# Altium PCB RF-Remute-FT-V1.1.PcbDoc
Units mm, origin at the board's own origin, x right, y up, seen from the top; angles counter-clockwise.
Board outline 40 x 50 mm, 2 copper layers (Top Layer, Bottom Layer); 25 components, 22 nets, 69 pads, 0 vias.
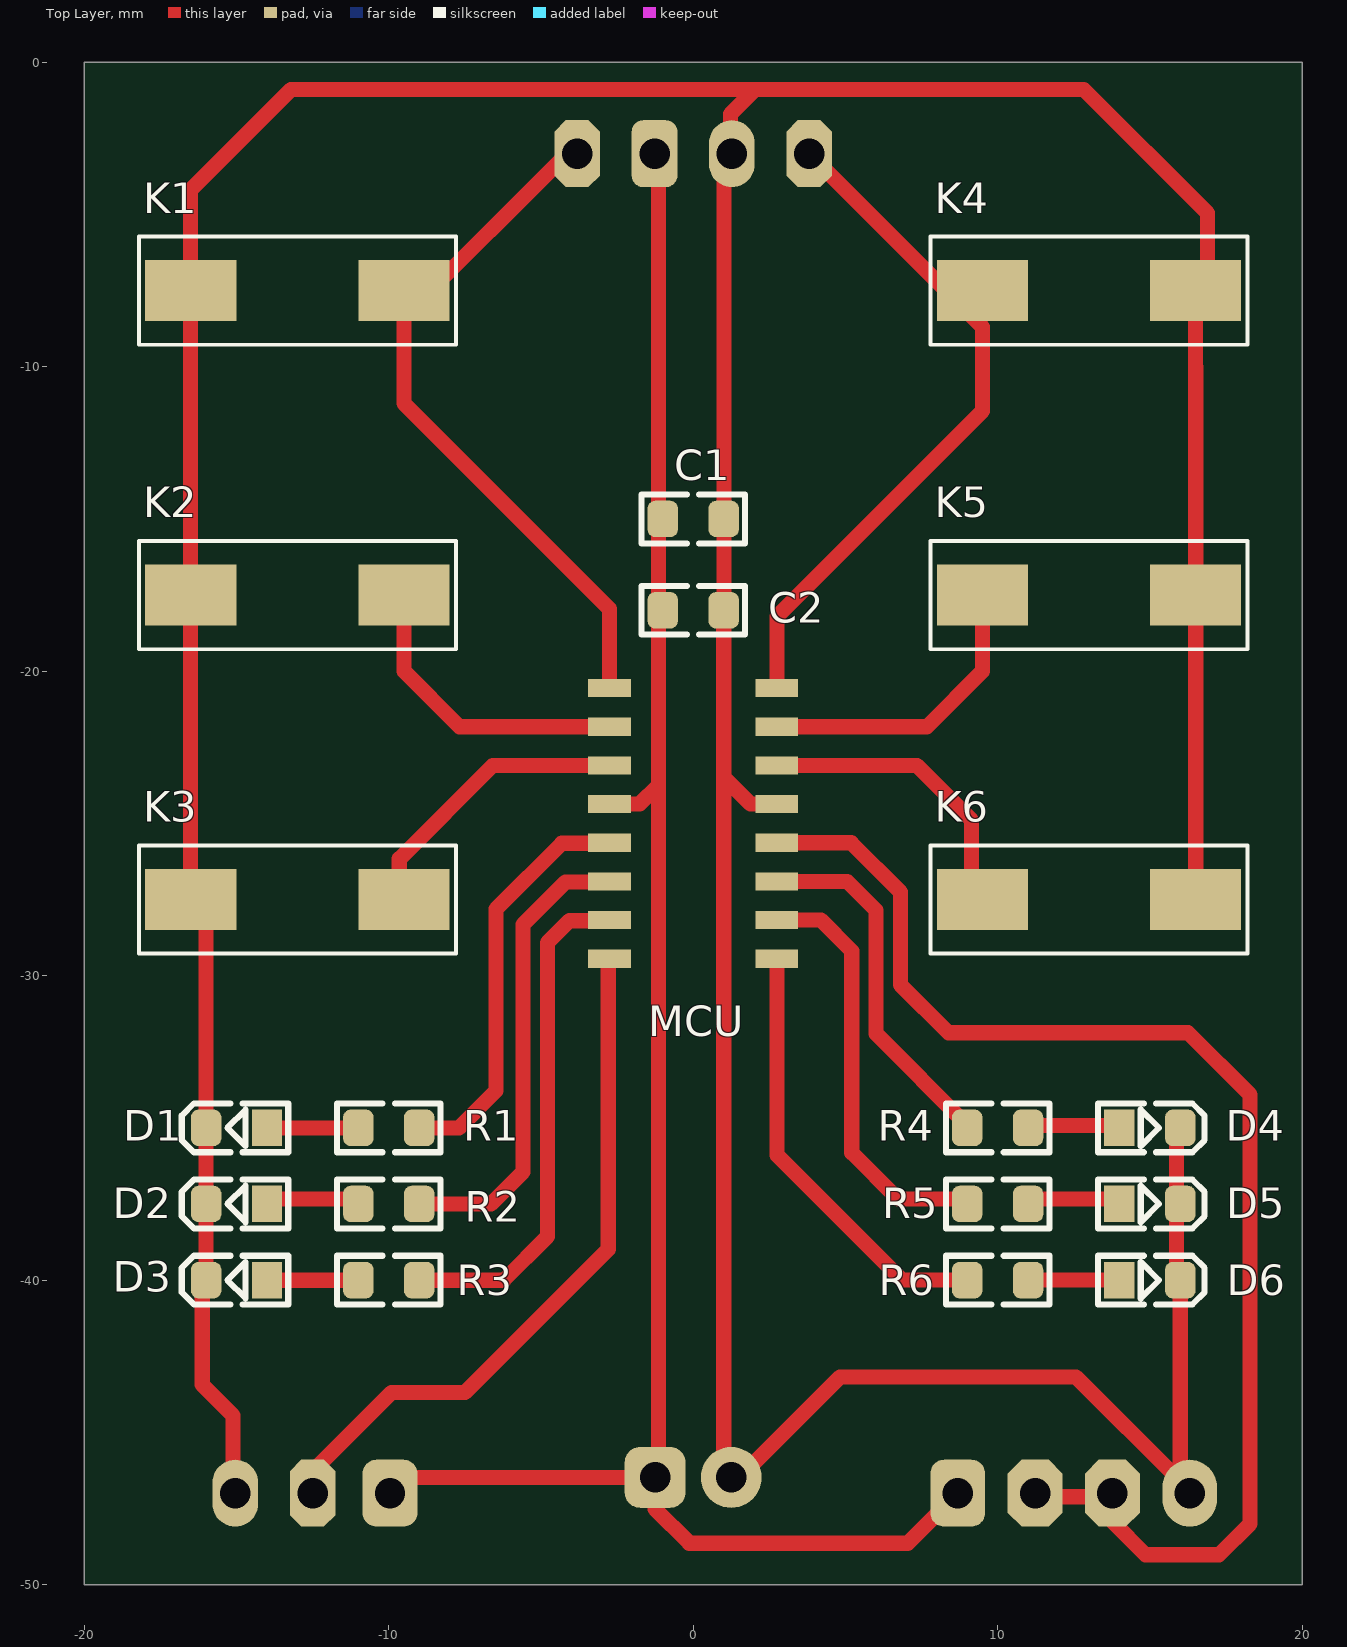
[diagram p0: Top Layer view]
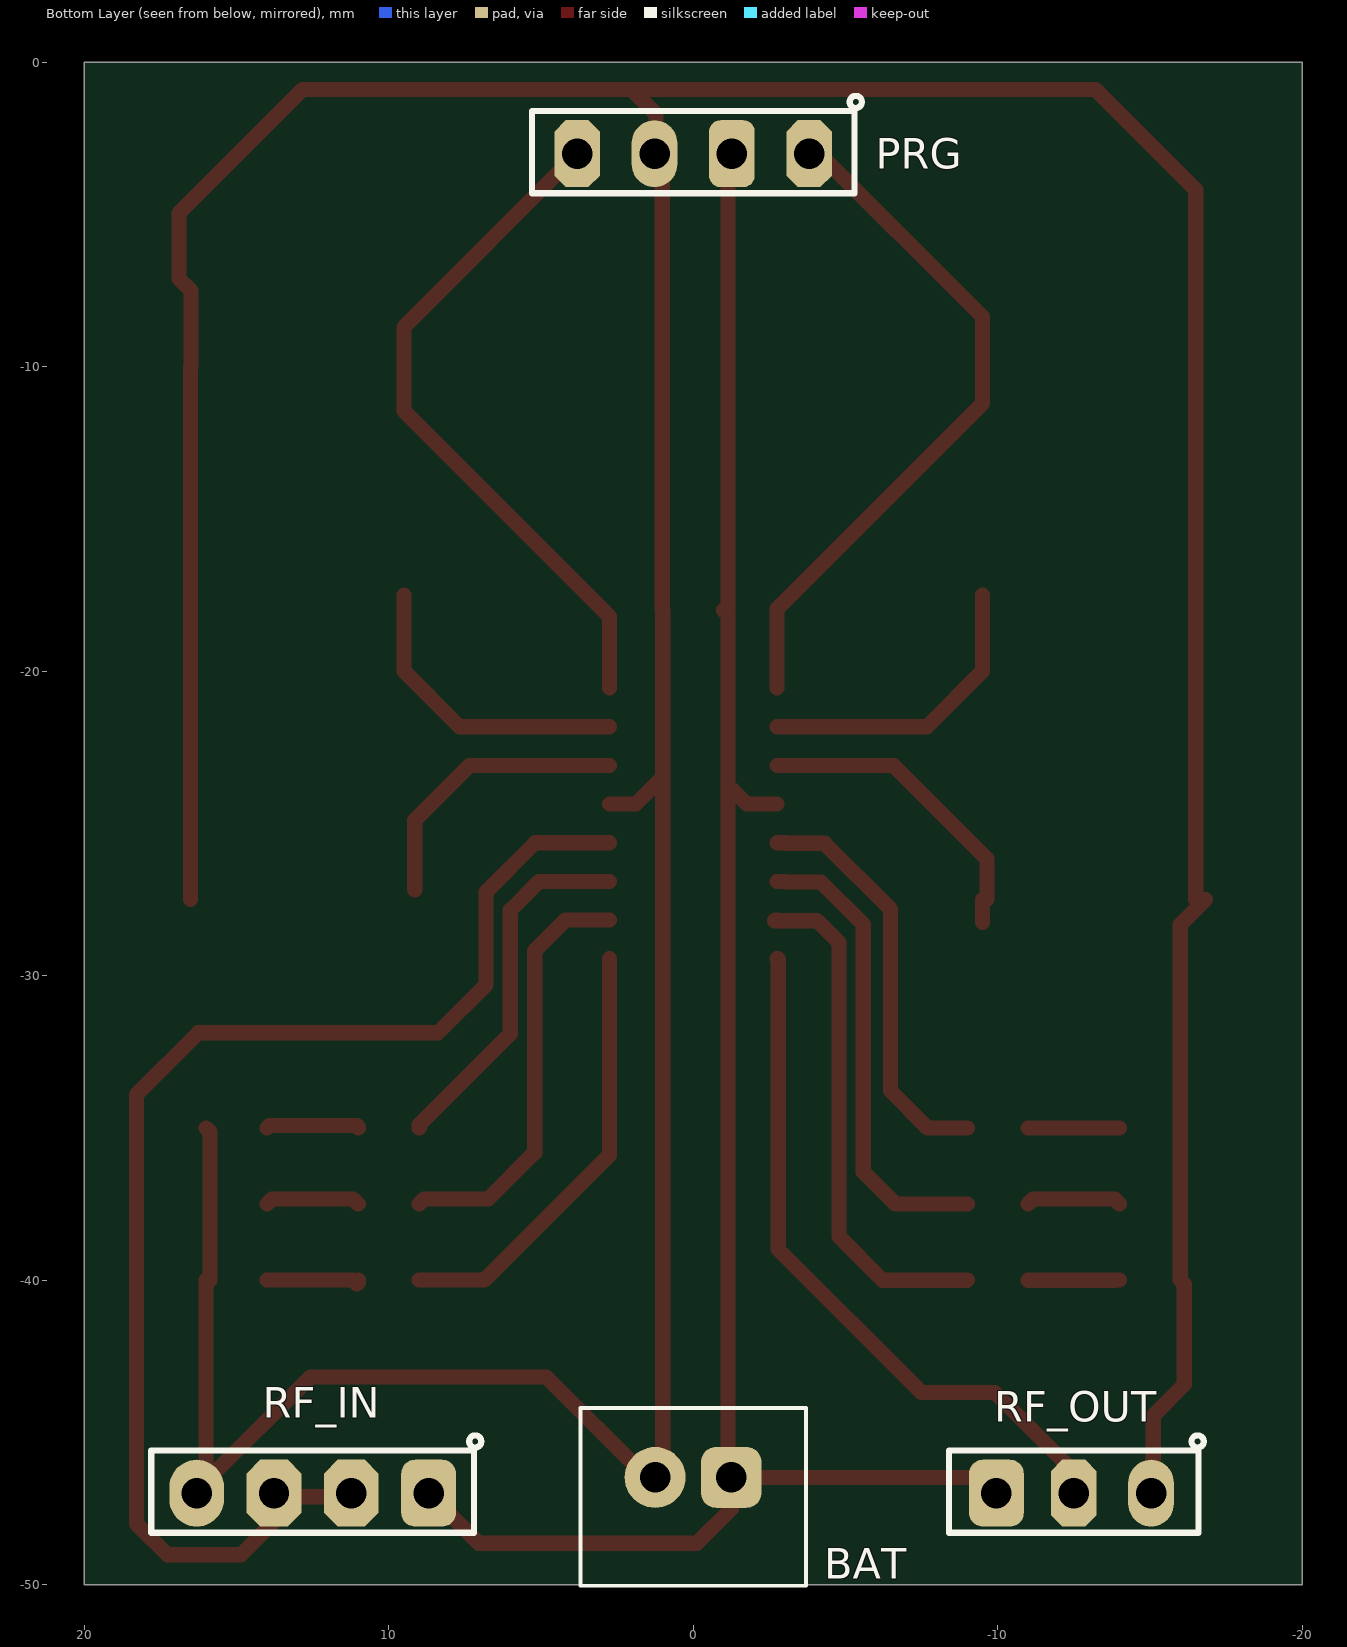
[diagram p1: Bottom Layer view, seen from below]

## Layer stack, top to bottom
Top Solder: solder mask 0.0102, Solder Resist, Dk 3.5
Top Layer: signal copper 0.0356
Dielectric 1: dielectric 0.32, FR-4, Dk 4.8
Bottom Layer: signal copper 0.0356
Bottom Solder: solder mask 0.0102, Solder Resist, Dk 3.5

## Board outline
-20,-50 20,-50 20,0 -20,0

## Design rules (kind name [scope] priority, off if disabled: settings)
Clearance [All] p1: gap=0.3 ignorepadtopadclearanceinfootprint=FALSE
PolygonConnect [All] p1: connectstyle=Relief reliefconductorwidth=0.254 reliefentries=4 polygonreliefangle="90 Angle" airgapwidth=0.254
RoutingVias [All] p1: holewidth=0.711 width=1.27 viastyle="Through Hole" minholewidth=0.711 minwidth=1.27 maxholewidth=0.711 maxwidth=1.27
SolderMaskExpansion [All] p1: expansion=0.102 istentingtop=FALSE
Width [All] p1: maxlimit=0.5 minlimit=0.254 preferedwidth=0.3 toplayer_minwidth=0.3 bottomlayer_maxwidth=0.254 bottomlayer_prefwidth=0.254 minimp=50.000000 maximp=50.000000 favimp=50.000000
30 further rules are at their usual default settings.

## Classes and differential pairs
component class RF-Remute-FT-V1.1: BAT C1 C2 D3 D4 D5 D6 K1 K2 K3 K4 K5 K6 MCU PRG R3 R4 R5 R6 RF_IN RF_OUT

## Components (designator, comment, footprint, x,y, rotation, side; value= is the part's Value field where it differs from the comment)
BAT "XH 2" "XH 2 PIN ( White )" 0,-46.482 r180 bottom
C1 "Capacitor SMD 0805" C0805 0,-15 r180 top value=10uF
C2 "Capacitor SMD 0805" C0805 0,-18 r180 top value=100nF
D1 "LED SMD 0805" "LED SMD 0805 (Green)" -15,-35 r180 top
D2 "LED SMD 0805" "LED SMD 0805 (Green)" -15,-37.5 r180 top
D3 "LED SMD 0805" "LED SMD 0805 (Green)" -15,-40 r180 top
D4 "LED SMD 0805" "LED SMD 0805 (Green)" 15,-35 r0 top
D5 "LED SMD 0805" "LED SMD 0805 (Green)" 15,-37.5 r0 top
D6 "LED SMD 0805" "LED SMD 0805 (Green)" 15,-40 r0 top
K1 "Button" BUTTON -13,-7.5 r0 top
K2 "Button" BUTTON -13,-17.5 r0 top
K3 "Button" BUTTON -13,-27.5 r0 top
K4 "Button" BUTTON 13,-7.5 r180 top
K5 "Button" BUTTON 13,-17.5 r180 top
K6 "Button" BUTTON 13,-27.5 r180 top
MCU "FT60E023" SSOP-16 0,-25 r0 top
PRG "Female Header Single 4" HDR_F_1X4#1 0,-3 r0 bottom
R1 "Resistor SMD 0805" R0805 -10,-35 r0 top value=1K
R2 "Resistor SMD 0805" R0805 -10,-37.5 r0 top value=1K
R3 "Resistor SMD 0805" R0805 -10,-40 r0 top value=1K
R4 "Resistor SMD 0805" R0805 10,-35 r180 top value=1K
R5 "Resistor SMD 0805" R0805 10,-37.5 r180 top value=1K
R6 "Resistor SMD 0805" R0805 10,-40 r180 top value=1K
RF_IN "Female Header Single 4" HDR_F_1X4#2 12.5,-47 r0 bottom
RF_OUT "Female Header Single 3" HDR_F_1X3 -12.5,-47 r0 bottom

## Footprints (in the part's own frame and the unit in brackets; to place one, negate y for a bottom-side part, rotate by r counter-clockwise, add the part's x,y. Pads: shape width x height; smd on the part's side, far side on the other; paste and mask are expansions set on the pad)
BUTTON [mm] "KEY"
  rect 3x2 smd: 1(-3.5,0) 2(3.5,0)
  silkscreen extent -5.21,-1.78 5.21,1.78, body extent -5,-1.75 5,1.75, height 4.35
C0805 [mm] "CHIP Capacitor, 2.0X1.3mm, 0805 (Make www.tarahiboard.com)"
  rrect50% 1x1.2 smd mask+0.075: 1(-1,0) 2(1,0)
  Top Layer pour cut-out: -0.5,0.8 0.5,0.8 0.5,-0.8 -0.5,-0.8
  silkscreen extent -1.7,-0.8 1.7,0.8, body extent -1,-0.62 1,0.63, height 1
HDR_F_1X3 [mm] "HEADER FEMALE pitch: 2.54mm (Make www.tarahiboard.com)"
  oval 1.5x2.2 hole 1 mask+0.1: 1(-2.54,0)
  oct 1.5x2.2 hole 1 mask+0.1: 2(0,0)
  rrect50% 1.8x2.2 hole 1 mask+0.1: 3(2.54,0)
  silkscreen extent -4.27,-1.9 4.1,1.3, body extent -3.93,-1.3 3.94,1.2, height 8.5
HDR_F_1X4#1 [mm] "HEADER FEMALE pitch: 2.54mm (Make www.tarahiboard.com)"
  oct 1.5x2.2 hole 1 mask+0.1: 1(-3.81,0) 4(3.81,0)
  rrect50% 1.5x2.2 hole 1 mask+0.1: 2(-1.27,0)
  oval 1.5x2.2 hole 1 mask+0.1: 3(1.27,0)
  silkscreen extent -5.54,-1.9 5.3,1.3, body extent -5.2,-1.3 5.21,1.2, height 8.5
HDR_F_1X4#2 [mm] "HEADER FEMALE pitch: 2.54mm (Make www.tarahiboard.com)"
  rrect50% 1.8x2.2 hole 1 mask+0.1: 1(-3.81,0)
  oct 1.8x2.2 hole 1 mask+0.1: 2(-1.27,0) 3(1.27,0)
  oval 1.8x2.2 hole 1 mask+0.1: 4(3.81,0)
  silkscreen extent -5.54,-1.9 5.3,1.3, body extent -5.2,-1.3 5.21,1.2, height 8.5
"LED SMD 0805 (Green)" [mm] "(Make www.tarahiboard.com)"
  rect 1x1.2 smd mask+0.075: 1(-1,0)
  rrect50% 1x1.2 smd mask+0.075: 2(1,0)
  silkscreen extent -1.7,-0.8 1.8,0.8, body extent -1,-0.63 1,0.63, height 0.7
R0805 [mm] "CHIP RESISTOR 1/8 WATT ,2.0X1.3mm, 0805, 2012 (Make www.tarahiboard.com)"
  rrect50% 1x1.2 smd mask+0.05: 1(-1,0) 2(1,0)
  Top Layer pour cut-out: -0.5,0.8 0.5,0.8 0.5,-0.8 -0.5,-0.8
  silkscreen extent -1.7,-0.8 1.7,0.8, body extent -1.15,-0.67 1.15,0.68, height 0.76
SSOP-16 [mm]
  rect 1.4x0.6 smd mask+0.062: 1(-2.75,4.445) 2(-2.75,3.175) 3(-2.75,1.905) 4(-2.75,0.635) 5(-2.75,-0.635) 6(-2.75,-1.905) 7(-2.75,-3.175) 8(-2.75,-4.445) 9(2.75,-4.445) 10(2.75,-3.175) 11(2.75,-1.905) 12(2.75,-0.635) 13(2.75,0.635) 14(2.75,1.905) 15(2.75,3.175) 16(2.75,4.445)
  body extent -3.12,-4.99 3.12,4.99, height 1.59
"XH 2 PIN ( White )" [mm] "(Make www.tarahiboard.com)"
  round 2 hole 1: 1(-1.25,0)
  rrect50% 2x2 hole 1: 2(1.25,0)
  silkscreen extent -3.7,-3.56 3.7,2.29, body extent -3.7,-3.56 3.7,2.24, height 7

## Part data
BAT: library part "Conector XH 2 Pin", "Conector XH 2 Pin", ComponentLink1Description=Tarahiboard, ComponentLink1URL=https://www.tarahiboard.com/product/library-pack, DatasheetVersion=2022
C1 C2: "Capacitor C SMD 0805", ComponentLink1Description=Tarahiboard, ComponentLink1URL=https://www.tarahiboard.com, DatasheetVersion=2022
K1 K2 K3 K4 K5 K6: library part BUTTON-6.3.4-SMD, Actuator Color=Brown, Contact Current Rating=50mA, Contact Resistance=100mR, Manufacturer=Panasonic, Manufacturer Part Number=EVQ-PE605T, Max Operating Temperature=85°C, Max Voltage Rating (DC)=12V, Min Operating Temperature=-30°C, Operating Force=2.4N, Package Quantity=1000, Supplier Part Number 1=P13592S-ND, Actuator Length=1.5mm, Actuator Type=Standard, Category="Tactile Switches", ComponentLink1Description=https://datasheet.ciiva.com/25603/0900766b810ad3e5-25603911.pdf?src-supplier=RSComponents, ComponentLink1URL=https://datasheet.ciiva.com/25603/0900766b810ad3e5-25603911.pdf?src-supplier=RSComponents, ComponentLink2Description=https://datasheet.ciiva.com/30091/atv0000ce8-30091136.pdf?src-supplier=Onlinecomponents.com, ComponentLink2URL=https://datasheet.ciiva.com/30091/atv0000ce8-30091136.pdf?src-supplier=Onlinecomponents.com, ComponentLink3Description=https://datasheet.ciiva.com/16377/atk0000ce35-16377527.pdf?src-supplier=Future+Electronics, ComponentLink3URL=https://datasheet.ciiva.com/16377/atk0000ce35-16377527.pdf?src-supplier=Future+Electronics, ComponentLink4Description=https://datasheet.ciiva.com/16155/atv0000ce8-16155306.pdf?src-supplier=Onlinecomponents.com, ComponentLink4URL=https://datasheet.ciiva.com/16155/atv0000ce8-16155306.pdf?src-supplier=Onlinecomponents.com, Contact Plating=Silver, Current Rating=50mA, Electrical Life=30000Cycles, Illumination Type=Non-Illuminated,Illuminated, Lead Free="Lead Free", Mechanical Life=30000Cycles, Mount="Through Hole", Orientation=Straight, Packaging=Bulk, Pricing 1="1=0.42000, 10=0.41000, 25=0.38600, 100=0.33510, 250=0.30400, 500=0.28280, 1000=0.25452, 2500=0.23897, 5000=0.22200 (USD)", REACH SVHC="No SVHC", RoHS=Yes, RoHS Compliant=Yes, Series=EVQPE, Size=3.5mm, Stock 1=1845, Supplier 1=Digi-Key, Supplier 2=Digi-Key, Switch Function=Off-Mom, Switch Travel=0.25mm, Termination="PC Pin", Throw Configuration=SPST, Voltage Rating (DC)=12V
PRG RF_IN RF_OUT: "Female, pitch: 2.54mm", ComponentLink1Description=Tarahiboard, ComponentLink1URL=https://www.tarahiboard.com/product/library-pack, DatasheetVersion=2022
D1 D2 D3 D4 D5 D6: ComponentLink1Description=Tarahiboard, ComponentLink1URL=https://www.tarahiboard.com/product/library-pack, DatasheetVersion=2022
R1 R2 R3 R4 R5 R6: ComponentLink1Description="Website: Tarahiboard", ComponentLink1URL=https://www.tarahiboard.com/product/library-pack, DatasheetVersion=2022

## Nets (pads, with @x,y where several pads share a name; then routed paths per layer and width w, separated by ;. In a path a pad name is that pad's centre, name@x,y a point inside that pad or via, vN(x,y) a via of type N, cw(c..) or ccw(c..) an arc to the next point about the centre after c; other vN are vias at no path point)
DATA_IN: MCU.12 RF_IN.2 RF_IN.3 | length 43.8
  Top Layer w0.5: MCU.12 5.188,-25.635 6.807,-27.254 6.807,-30.302 8.382,-31.877 16.256,-31.877 18.288,-33.909 18.288,-48.006 17.272,-49.022 14.859,-49.022 13.77,-47.933 RF_IN.3 13.706,-47 13.589,-47.117 11.347,-47.117 RF_IN.2
DATA_OUT: MCU.8 RF_OUT.2 | length 23
  Top Layer w0.5: RF_OUT.2 -12.319,-46.819 -12.319,-46.101 -9.906,-43.688 -7.493,-43.688 -2.794,-38.989 -2.794,-29.464 -2.775,-29.445 MCU.8
GND: BAT.1 C1.1 C2.1 D1.2 D2.2 D3.2 D4.2 D5.2 D6.2 K1.1 K2.1 K3.1 K4.1 K5.1 K6.1 MCU.13 PRG.3 RF_IN.4 RF_OUT.1 | length 181.8
  Top Layer w0.5: K1.1@-16.51,-7.493 K3.1@-16.51,-27.5 ; K3.1 K3.1@-16.51,-27.5 ; K1.1 -16.51,-7.49 -16.51,-4.191 -13.208,-0.889 2.032,-0.889 ; RF_OUT.1 -15.04,-47.171 -15.113,-47.244 -15.113,-44.45 -16.129,-43.434 -16.129,-40.129 D3.2 D2.2 D1.2 -16,-28.323 -16.823,-27.5 K3.1@-16.51,-27.5 ; PRG.3@1.016,-3 1.016,-17.984 C2.1 1,-23.479 ; PRG.3 1.222,-3 1.222,-1.699 2.032,-0.889 ; MCU.13 1.886,-24.365 1,-23.479 ; D4.2 15.875,-35.125 15.875,-40.005 15.88,-40 D6.2 RF_IN.4@16,-46.607 ; RF_IN.4@16.351,-46.958 16.383,-46.99 16.373,-47 RF_IN.4 16.31,-46.917 RF_IN.4@16,-46.607 ; K6.1@16.51,-27.5 16.51,-10.01 16.5,-10 K4.1 16.891,-7.109 16.891,-4.953 12.827,-0.889 2.032,-0.889 ; 1,-23.479 1,-45.958 1.27,-46.228 1.25,-46.248 BAT.1 1.524,-46.482 4.826,-43.18 12.573,-43.18 RF_IN.4@16,-46.607
KEY1: K1.2 MCU.1 PRG.1 | length 23.1
  Top Layer w0.5: PRG.1 -3.81,-2.921 -3.937,-2.794 -9.5,-8.357 -9.5,-10 -9.5,-11.201 -2.75,-17.951 MCU.1
KEY2: K2.2 MCU.2 | length 10
  Top Layer w0.5: K2.2 -9.5,-20 -7.675,-21.825 MCU.2
KEY3: K3.2 MCU.3 | length 10.3
  Top Layer w0.5: K3.2@-9.652,-27.5 -9.652,-26.162 -6.585,-23.095 MCU.3 ; K3.2@-9.5,-28.251 K3.2
KEY4: K4.2 MCU.16 PRG.4 | length 22.7
  Top Layer w0.5: MCU.16 2.75,-18.205 9.5,-11.455 9.5,-10 9.5,-8.69 PRG.4
KEY5: K5.2 MCU.15 | length 10
  Top Layer w0.5: MCU.15 7.675,-21.825 9.5,-20 K5.2
KEY6: K6.2 MCU.14 | length 9.4
  Top Layer w0.5: MCU.14 7.347,-23.095 9.144,-24.892 K6.2@9.144,-27.178
NetD1_1: D1.1 R1.1 | length 3
  Top Layer w0.5: D1.1 R1.1
NetD2_1: D2.1 R2.1 | length 3.1
  Top Layer w0.5: D2.1 -14,-37.495 -13.843,-37.338 -11.162,-37.338 R2.1
NetD3_1: D3.1 R3.1 | length 3
  Top Layer w0.5: D3.1 -13.848,-40 -13.843,-40.005 -11.005,-40.005 R3.1
NetD4_1: D4.1 R4.1 | length 3.1
  Top Layer w0.5: R4.1 11,-34.974 11.049,-34.925 13.925,-34.925 D4.1
NetD5_1: D5.1 R5.1 | length 3.1
  Top Layer w0.5: R5.1 11.014,-37.5 11.176,-37.338 13.838,-37.338 D5.1
NetD6_1: D6.1 R6.1 | length 3.2
  Top Layer w0.5: R6.1 11,-40.083 11.049,-40.132 11.181,-40 D6.1
OUT1: MCU.5 R1.2 | length 13.6
  Top Layer w0.5: R1.2 -7.695,-35 -6.477,-33.782 -6.477,-27.813 -4.318,-25.654 -3.048,-25.654 -3.029,-25.635 MCU.5
OUT2: MCU.6 R2.2 | length 15.4
  Top Layer w0.5: R2.2 -6.639,-37.5 -5.588,-36.449 -5.588,-28.321 -4.191,-26.924 -3.048,-26.924 -3.029,-26.905 MCU.6
OUT3: MCU.7 R3.2 | length 17
  Top Layer w0.5: R3.2 -8.995,-40.005 -6.223,-40.005 -4.788,-38.57 -4.788,-28.918 -4.064,-28.194 -2.667,-28.194 -2.686,-28.175 MCU.7
OUT4: MCU.11 R4.2 | length 12
  Top Layer w0.5: MCU.11 5.061,-26.905 6.007,-27.851 6.007,-31.907 9,-34.9 R4.2
OUT5: MCU.10 R5.2 | length 14
  Top Layer w0.5: MCU.10 4.195,-28.175 5.207,-29.187 5.207,-35.814 6.731,-37.338 8.838,-37.338 R5.2
OUT6: MCU.9 R6.2 | length 14.4
  Top Layer w0.5: MCU.9 2.75,-35.897 6.853,-40 R6.2
VCC: BAT.2 C1.2 C2.2 MCU.4 PRG.2 RF_IN.1 RF_OUT.3 | length 66.5
  Top Layer w0.5: RF_OUT.3 -9.916,-47 -9.398,-46.482 BAT.2 ; MCU.4 -1.759,-24.365 -1.143,-23.749 ; PRG.2 -1.143,-3.127 C2.2@-1.143,-18 ; C2.2 -1.143,-18.143 -1.143,-23.749 ; RF_IN.1 7.049,-48.641 -0.127,-48.641 -1.25,-47.518 BAT.2 ; BAT.2 -1.143,-46.375 -1.143,-23.749

## Silkscreen, mask and mechanical layers (free items; w line width, h text height)
Mechanical 13:
  the board outline again, w0.1